# Altium PCB PCB_TechDemo.PcbDoc (part 2 of 2)
Units mm, origin at the board's own origin, x right, y up, seen from the top; angles counter-clockwise.
Board outline 152.4 x 101.6 mm, 2 copper layers (Top Layer, Bottom Layer); 203 components, 210 nets, 892 pads, 0 vias.
Unrouted connection lines stored in the file: 608.
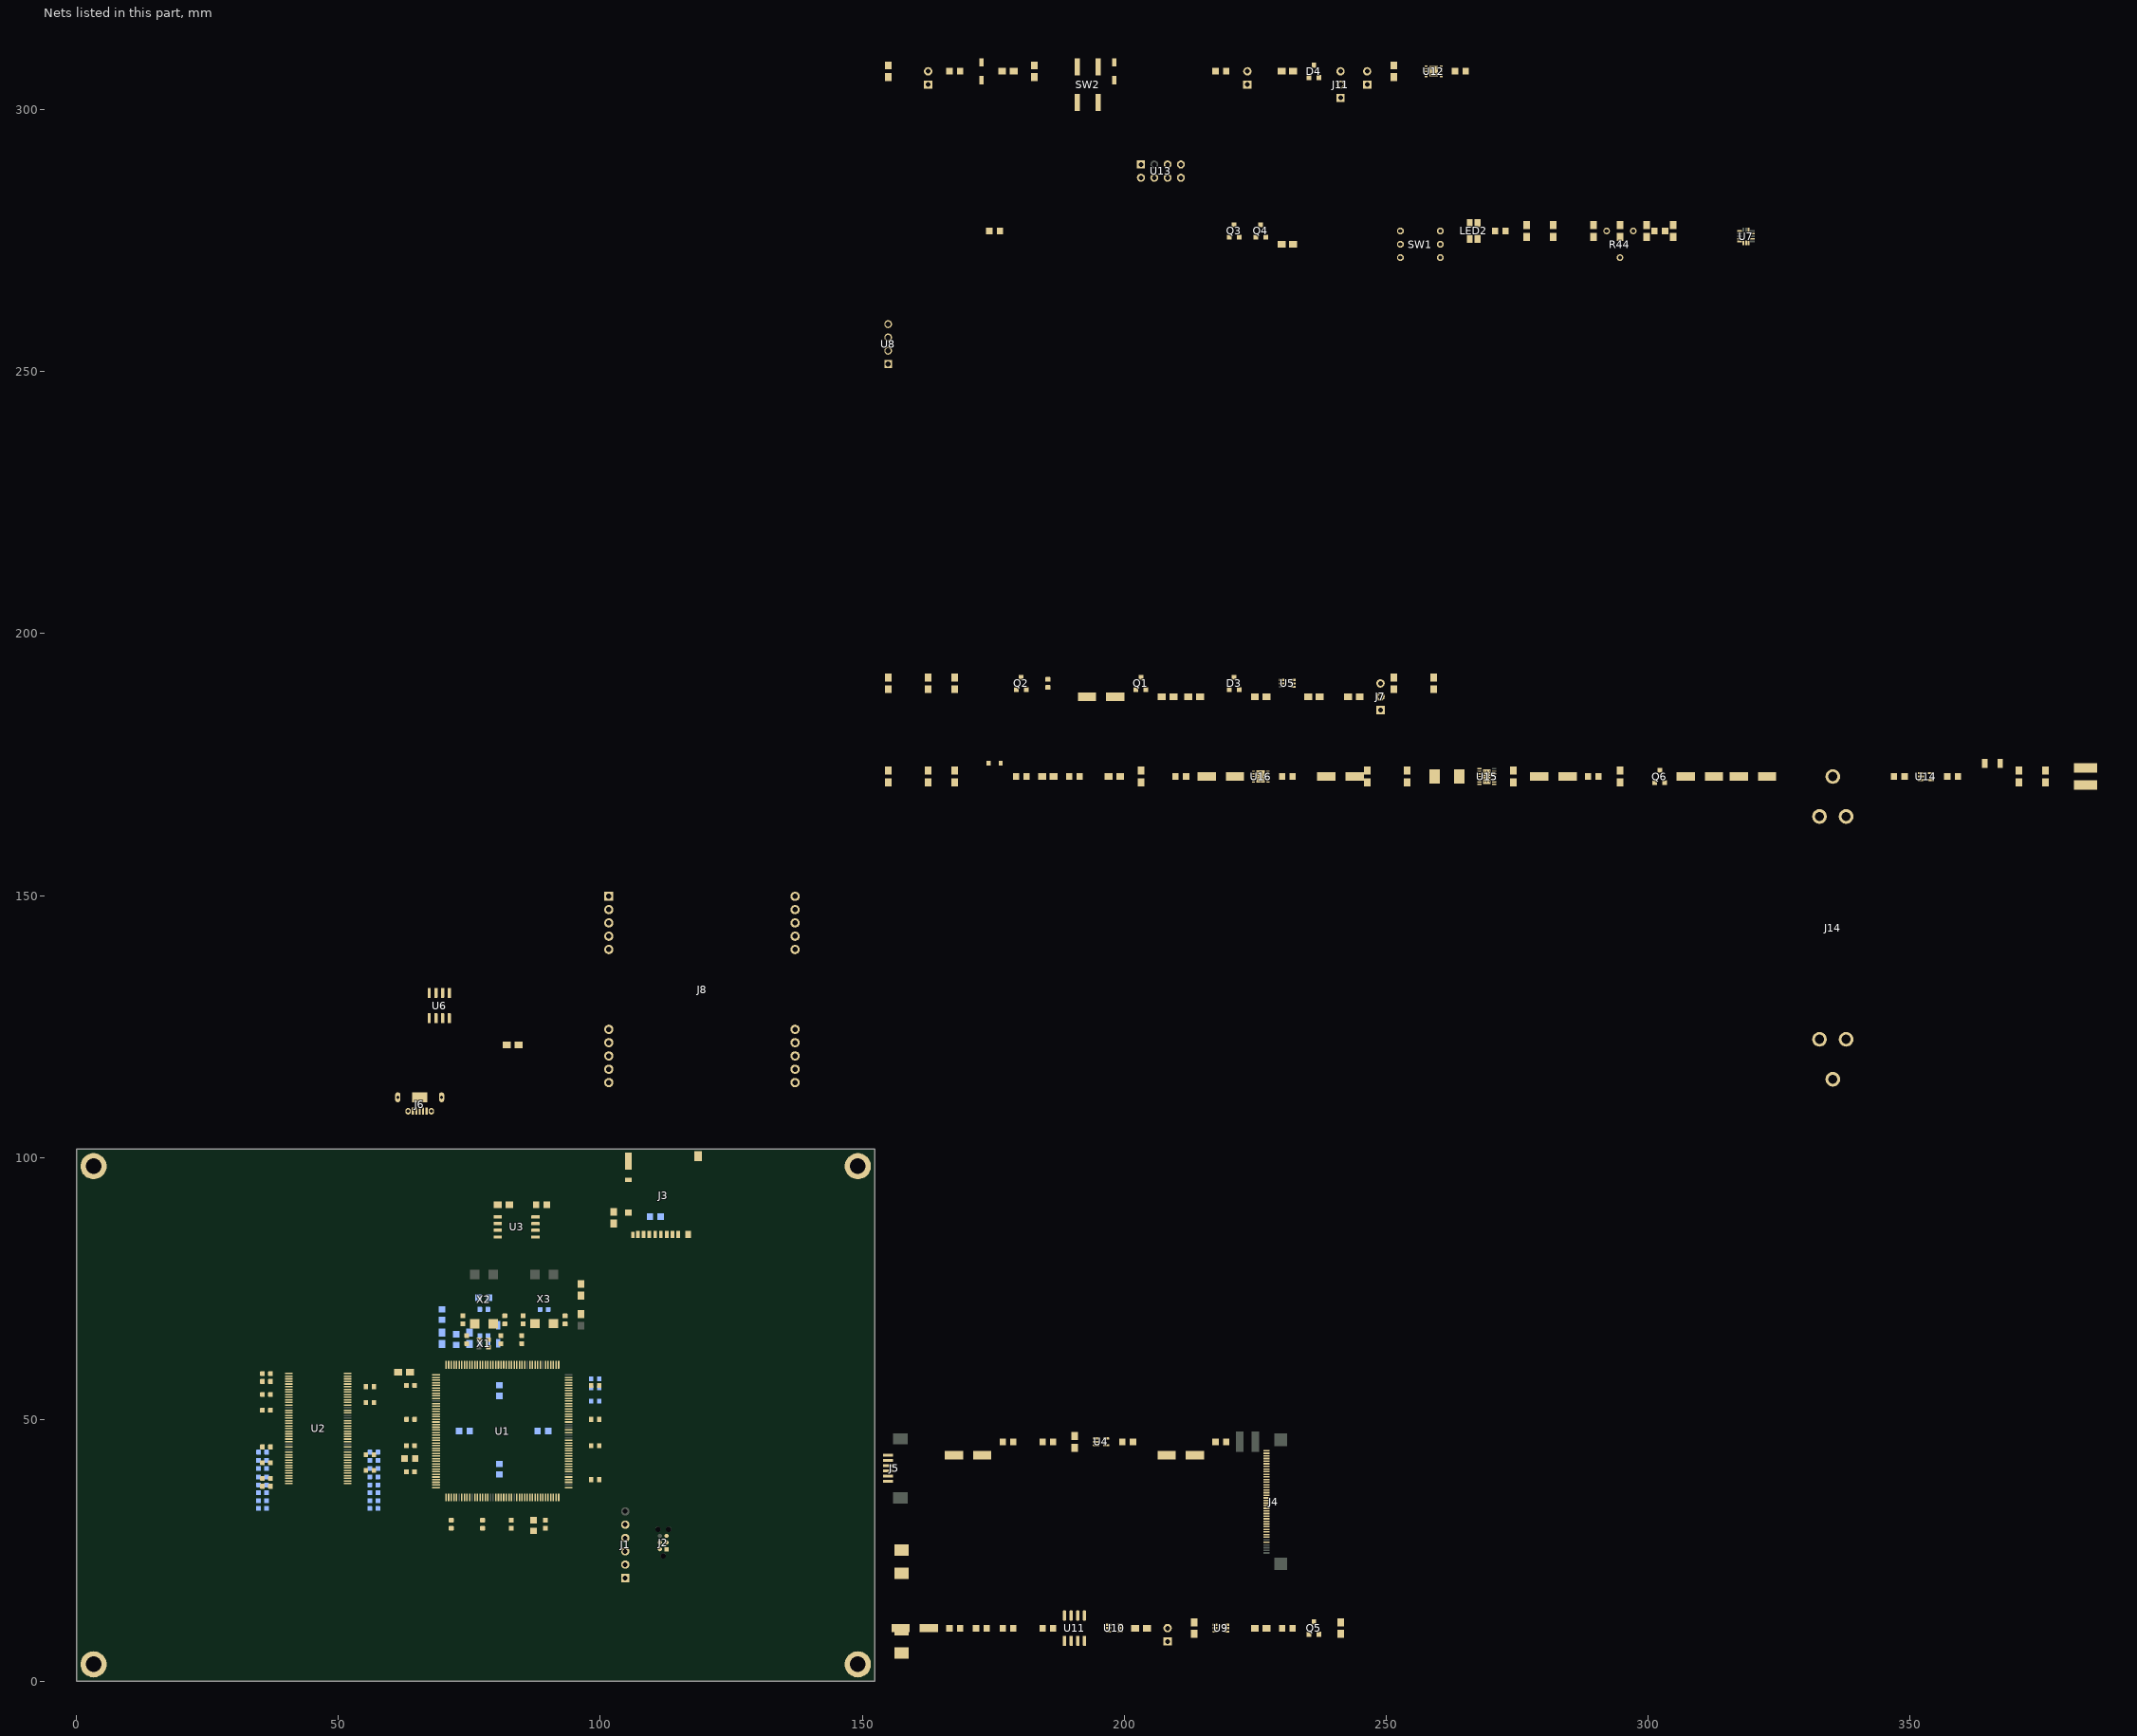
[diagram p2: the nets of this part, all layers, seen from the top]

## Part data
C1 C22 C23 C24 C25 C26 C27 C28 C29 C54 C61 C62 C63: library part CAP_2.2UF_50V_0805, "CAP CER 2.2UF 50V X7R 0805", Case/Package=0805, Supplier Part Number 1=587-4963-1-ND, TOLERANCE=20%, VOLTAGE=50V, MFG="Taiyo Yuden", MFG_PN=UMK212BB7225MG-T, Supplier 1=Digi-Key
C2 C3: library part CAP_27PF_50V_0603, "CAP CER 4.7PF 50V C0G/NPO 0603", Case/Package=0603, Supplier Part Number 1=311-4032-1-ND, TOLERANCE=10%, VOLTAGE=50V, MFG=Yageo, MFG_PN=CC0603KRNPO9BN270, Supplier 1=Digi-Key
C4 C5: library part CAP_4.7PF_50V_0603, "CAP CER 4.7PF 50V C0G/NPO 0603", Case/Package=0603, Supplier Part Number 1=311-1740-1-ND, TOLERANCE=+/-.25pF, VOLTAGE=50V, MFG=Yageo, MFG_PN=CC0603CRNPO9BN4R7, Supplier 1=Digi-Key
C6 C7 C8 C9 C10 C11 C12 C13 C14 C15 C16 C17 C18 C19 C20 C21 C32 C33 C34 C35 C36 C37 C38 C39 C40 C41 C42 C43: library part CAP_0.1UF_50V_0603, "CAP CER 0.1UF 50V X7R 0603", Case/Package=0603, Supplier Part Number 1=311-1344-1-ND, TOLERANCE=10%, VOLTAGE=50V, MFG=Yageo, MFG_PN=CC0603KRX7R9BB104, Supplier 1=Digi-Key
  C32 C33 C34 C35 C36 C37 C38 C39 C40 C41 C42 C43: ClassName=Memory_SDRAM
C30 C31 C44 C47 C48 C51 C52 C53 C56 C57 C58 C60 C64 C67 C70 C74: library part CAP_0.1UF_50V_0805, "CAP CER 0.1UF 50V X7R 0805", Case/Package=0805, Supplier Part Number 1=478-1395-1-ND, TOLERANCE=10%, VOLTAGE=50V, MFG=AVX, MFG_PN=08055C104KAT2A, Supplier 1=Digi-Key
  C30: ClassName=Memory_Quad_SPI_Flash
  C31: ClassName=Memory_MicroSD
  C51: ClassName=UI_Accelerometer
  C52: ClassName=UI_ADC
  C53: ClassName=UI_UltraSonic
  C64 C67: ClassName=Power_3V3
  C70: ClassName=Power_5V
  C74: ClassName=VBAT_Monitor
C45 C49 C50 C59 C65 C68 C69 C71: library part CAP_22UF_35V_ALE_NF, "CAP, AL E, 22UF, 35V, 20%, ROHS", Supplier Part Number 1=493-10138-1-ND, TOLERANCE=20%, VOLTAGE=35V, MFG=NICHICON, MFG_PN=UZS1C220MCL1GB, Supplier 1=Digi-Key
  C50: ClassName=Serial_USB_FS
  C65: ClassName=Power_3V3
  C69 C71: ClassName=Power_5V
C46 C55: library part CAP_1.0UF_50V_0805, "CAP CER 1UF 50V X7R 0805", Case/Package=0805, Supplier Part Number 1=587-6375-1-ND, TOLERANCE=20%, VOLTAGE=50V, MFG="Taiyo Yuden", MFG_PN=UMK212B7105MGHT, Supplier 1=Digi-Key
C66: library part CAP_47UF_16V_ALE_NF, "CAP ALUM 47UF 20% 16V SMD", Supplier Part Number 1=493-3916-1-ND, TOLERANCE=20%, VOLTAGE=16V, ClassName=Power_3V3, MFG=NICHICON, MFG_PN=UCL1C470MCL6GS, Supplier 1=Digi-Key
C72: library part CAP_18PF_50V_0805, "CAP CER 18PF 50V C0G/NP0 0805", Case/Package=0805, Supplier Part Number 1=738-CML0805C0G180JT50VCT-ND, TOLERANCE=5%, VOLTAGE=50V, ClassName=Power_5V, MFG="Stackpole Electronics Inc", MFG_PN=CML0805C0G180JT50V, Supplier 1=Digi-Key
C73: library part CAP_18NF_50V_0805, "CAP CER 0.018UF 50V X7R 0805", Case/Package=0805, Supplier Part Number 1=311-1137-1-ND, TOLERANCE=10%, VOLTAGE=50V, ClassName=Power_5V, MFG=Yageo, MFG_PN=CC0805KRX7R9BB183, Supplier 1=Digi-Key
D1 D5 D6: library part DIODE_1N4148W-7-F, "DIODE GEN PURP 100V 300MA SOD123", Case/Package=SOD-123, CURRENT=300mA, Supplier Part Number 1=1N4148W-FDICT-ND, MFG="Diodes Incorporated", MFG_PN=1N4148W-7-F, Supplier 1=Digi-Key
D2 D7: library part DIODE_SCHOTTKY_MBRS2040LT3G, "DIODE SCHOTTKY 40V 2A SMB", Case/Package=SMB, CURRENT=2A, Supplier Part Number 1=MBRS2040LT3GOSCT-ND, ComponentLink1Description="Manufacturer Link", ComponentLink1URL=http://www.fairchildsemi.com/, ComponentLink2Description=Datasheet, ComponentLink2URL=http://www.fairchildsemi.com/ds/1N%2F1N4148.pdf, MFG="ON SEMICONDUCTOR", MFG_PN=MBRS2040LT3G, PackageReference=DO-35, Supplier 1=Digi-Key
D3 D4: library part DIODE_TVS_GSOT03C-G3-08, "TVS DIODE 3.3V 12.3V SOT23", Case/Package=SOT-23, POWER="30A (8/20us)", Supplier Part Number 1=GSOT03C-G3-08GICT-ND, MFG="Vishay Semiconductor", MFG_PN=GSOT03C-G3-08, Supplier 1=Digi-Key
  D3: ClassName=Serial_DebugPort
D8: library part DIODE_ZENER_MMSZ5227BS-7-F, "DIODE ZENER 3.6V 200MW SOD323", Case/Package=SOD323, POWER=200mW, Supplier Part Number 1=MMSZ5227BS-FDICT-ND, ClassName=VBAT_Monitor, MFG="Vishay Semiconductor", MFG_PN=MMSZ5227BS-7-F, Supplier 1=Digi-Key
FB1 FB2 FB3 FB4 FB5: library part FERRITE_BLM21AG102SN1D, "FERRITE, 1KOHM AT 100MHZ, 220MA, .450DCR", Supplier Part Number 1=490-1041-1-ND, TOLERANCE=10%, MFG=MURATA, MFG_PN=BLM21AG102SN1D, Supplier 1=Digi-Key
  FB2: ClassName=Serial_USB_FS
  FB3: ClassName=Serial_DebugPort
  FB4: ClassName=UI_ADC
J1: library part CONN_6P_SINGLE_ROW, "CONN HEADER VERT 6POS 2.54MM", Case/Package=6P_2.54MM, Supplier Part Number 1=S1212EC-06-ND, MFG="Sullins Connector Solutions", MFG_PN=PREC006SFAN-RC, Supplier 1=Digi-Key
J2: "CABLE TAG-CONNECT IN-CIRCUIT", Supplier Part Number 1=TC2030-MCP-NLTC-ND, MFG="Tag-Connect LLC", MFG_PN=TC2030-MCP-NL, Supplier 1=Digi-Key
J3: library part CONN_HIROSE_DM3BT-DSF-PEJS, "CONN MICRO SD CARD PUSH-PUSH R/A", Supplier Part Number 1=HR1942CT-ND, ClassName=Memory_MicroSD, MFG="Hirose Electric Co Ltd", MFG_PN=DM3BT-DSF-PEJS, Supplier 1=Digi-Key
J4: library part CONN_MOLEX_0541044033, "CONN FFC TOP 40POS 0.50MM R/A", Supplier Part Number 1=WM11091CT-ND, Case/Package=0541044033, MFG=Molex, MFG_PN=0541044033, Supplier 1=Digi-Key
J5: library part CONN_MOLEX_0522710679, "CONN FPC BOTTOM 6POS 1.00MM R/A", Supplier Part Number 1=WM7955CT-ND, Case/Package=0522710679, MFG=Molex, MFG_PN=0522710679, Supplier 1=Digi-Key
J6: library part CONN_USB_MOLEX_0475900001, "CONN RCPT MICRO USB AB 5P SMD RA", Supplier Part Number 1=WM17144CT-ND, ClassName=Serial_USB_FS, MFG=Molex, MFG_PN=0475900001, Supplier 1=Digi-Key
J7 J11: library part CONN_3P_SINGLE_ROW, "CONN HEADER VERT 3POS 2.54MM", Case/Package=3P_2.54MM, Supplier Part Number 1=S1212EC-03-ND, MFG="Sullins Connector Solutions", MFG_PN=PREC003SFAN-RC, Supplier 1=Digi-Key
  J7: ClassName=Serial_DebugPort
J8: library part CONN_TD_EXPANSION_MODULE, "CONN HEADER VERT 6POS 2.54MM", Case/Package=EXP_SLOT, Supplier Part Number 1=S7013-ND, MFG="Sullins Connector Solutions", MFG_PN=PPTC151LFBN-RC, Supplier 1=Digi-Key
J9 J10 J12 J13: library part CONN_2P_SINGLE_ROW, "CONN HEADER VERT 2POS 2.54MM", Case/Package=2P_2.54MM, Supplier Part Number 1=S1212EC-02-ND, MFG="Sullins Connector Solutions", MFG_PN=PREC002SFAN-RC, Supplier 1=Digi-Key
J14: library part CONN_BATTERY_18650, "BATTERY CONTACT CLP 18650 PC PIN", Case/Package=2P_2.54MM, Supplier Part Number 1=36-54-ND, MFG="Keystone Electronics", MFG_PN=54, Supplier 1=Digi-Key
L1: library part INDUCTOR_LPS4018-472MRC, "SHIELDED POWER INDUCTORS, 4.7UH", CURRENT=1.9A, Supplier Part Number 1=2457-LPS4018-472MRC-ND, TOLERANCE=20%, MFG=COILCRAFT, MFG_PN=LPS4018-472MRC, Supplier 1=Digi-Key
L2: library part INDUCTOR_SDR0403-1R0ML, "FIXED IND 1UH 3.8A 33 MOHM SMD", CURRENT=5.5A, Supplier Part Number 1=SDR0403-1R0MLCT-ND, TOLERANCE=20%, ClassName=Power_3V3, MFG="Bourns Inc.", MFG_PN=SDR0403-1R0ML, Supplier 1=Digi-Key
L3: library part INDUCTOR_IHLP2020BZER1R0M01, "FIXED IND 1UH 3.8A 33 MOHM SMD", CURRENT=16A, Supplier Part Number 1=541-1087-1-ND, TOLERANCE=20%, ClassName=Power_5V, MFG="Bourns Inc.", MFG_PN=IHLP2020BZER1R0M01, Supplier 1=Digi-Key
LED1: library part DIODE_LED_GREEN_LTST-C170GKT, "DIODE, LED GREEN CLEAR SMD", Case/Package=0805, Supplier Part Number 1=160-1179-1-ND, MFG="Lite-On Inc.", MFG_PN=LTST-C170GKT, Supplier 1=Digi-Key
LED2: library part LED_RED_GREEN_HSMF-A201-A00J1, "LED GREEN/RED CLEAR 4PLCC SMD", Case/Package=4PLCC, Supplier Part Number 1=516-2491-1-ND, ClassName=UI_LED, MFG="Broadcom Limited", MFG_PN=HSMF-A201-A00J1, Supplier 1=Digi-Key
MTH1 MTH2 MTH3 MTH4: "3MM IN D. MT HOLE"
Q1: library part MOSFET_PCH_IRLML5103PBF, "MOSFET P CHN, VDS=30V, RDSON = .6OHM, SOT 23", Supplier Part Number 1=IRLML5103PBFCT-ND, ClassName=Serial_USB_FS, ComponentLink1Description="Manufacturer Link", ComponentLink1URL=http://www.fairchildsemi.com/, ComponentLink2Description=Datasheet, ComponentLink2URL=http://www.fairchildsemi.com/ds/2N%2F2N3904.pdf, MFG="INTERNATIONAL RECTIFIER", MFG_PN=IRLML5103PBF, Supplier 1=Digi-Key
Q2 Q3 Q4 Q5: library part MOSFET_NCH_2N7002-7-F, "MOSFET N-CH 60V 115MA SOT23-3", Case/Package=SOT-23, Supplier Part Number 1=2N7002-FDICT-ND, MFG="Diodes Incorporated", MFG_PN=2N7002-7-F, Supplier 1=Digi-Key
  Q2: ClassName=Serial_USB_FS
  Q3 Q4: ClassName=UI_LED
Q6: library part MOSFET_PCH_NTR3A30PZT1G, "MOSFET P-CH 20V 3A SOT23-3", Supplier Part Number 1=NTR3A30PZT1GOSCT-ND, ComponentLink1Description="Manufacturer Link", ComponentLink1URL=http://www.fairchildsemi.com/, ComponentLink2Description=Datasheet, ComponentLink2URL=http://www.fairchildsemi.com/ds/2N%2F2N3904.pdf, MFG="ON Semiconductor", MFG_PN=NTR3A30PZT1G, Supplier 1=Digi-Key
R1: library part RES_200_0805_1/8W_1%_1, "RES SMD 200 OHM 1% 1/8W 0805", Case/Package=0805, POWER=.125W, Supplier Part Number 1=311-200CRCT-ND, TOLERANCE=1%, MFG=Yageo, MFG_PN=RC0805FR-07200RL, Supplier 1=Digi-Key
R2 R3: library part RES_1M_0603_1/10W_1%, "RES SMD 1M OHM 1% 1/10W 0603", Case/Package=0603, POWER=.10W, Supplier Part Number 1=311-1.00MHRCT-ND, TOLERANCE=1%, MFG=Yageo, MFG_PN=RC0603FR-071ML, Supplier 1=Digi-Key
R4 R5 R34: library part RES_10K_0603_1/10W_1%, "RES SMD 10K OHM 1% 1/10W 0603", Case/Package=0603, POWER=.10W, Supplier Part Number 1=311-10.0KHRCT-ND, TOLERANCE=1%, MFG=Yageo, MFG_PN=RC0603FR-0710KL, Supplier 1=Digi-Key
  R34: ClassName=Serial_USB_FS
R6 R7 R11 R12 R13 R14 R15 R16 R17 R18 R19 R20 R21 R22 R23 R24 R25 R26: library part RES_100K_0603_1/10W_1%, "RES SMD 100K OHM 1% 1/10W 0603", Case/Package=0603, POWER=.10W, Supplier Part Number 1=311-10.0KHRCT-ND, TOLERANCE=1%, MFG=Yageo, MFG_PN=RC0603FR-07100KL, Supplier 1=Digi-Key
  R11 R12 R13 R14 R15 R16 R17 R18 R19 R20 R21 R22 R23 R24 R25 R26: ClassName=Memory_SDRAM
R8 R29 R30 R55 R56 R59 R60: library part RES_0_0805_1/8W, "RES SMD 0 OHM JUMPER 1/8W 0805", Case/Package=0805, POWER=.125W, Supplier Part Number 1=311-0.0ARCT-ND, TOLERANCE=JUMPER, MFG=Yageo, MFG_PN=RC0805JR-070RL, Supplier 1=Digi-Key
  R29 R30: ClassName=Serial_USB_FS
  R55 R56: ClassName=Power_3V3
  R59 R60: ClassName=Power_5V
R9: library part RES_10K_0805_1/4W_1%_1, "RES SMD 10K OHM 1% 1/4W 0805", Case/Package=0805, POWER=.125W, Supplier Part Number 1=311-0.0ARCT-ND, TOLERANCE=JUMPER, MFG=Yageo, MFG_PN=RC0805JR-070RL, Supplier 1=Digi-Key
R10 R45 R47 R49 R52: library part RES_10K_0805_1/4W_1%, "RES SMD 10K OHM 1% 1/4W 0805", Case/Package=0805, POWER=.25W, Supplier Part Number 1=2019-SG73S2ATTD1002FCT-ND, TOLERANCE=1%, MFG="KOA Speer Electronics, Inc.", MFG_PN=SG73S2ATTD1002F, Supplier 1=Digi-Key
  R10: ClassName=Memory_Quad_SPI_Flash
  R45: ClassName=UI_Accelerometer
R27 R35 R36 R37 R40 R41 R42 R43 R46 R48 R50 R51 R53 R61 R64 R65 R66: library part RES_100K_0805_1/4W_1%, "RES SMD 100K OHM 1% 1/4W 0805", Case/Package=0805, POWER=.25W, Supplier Part Number 1=2019-RK73H2ATTD1003FCT-ND, TOLERANCE=1%, MFG="KOA Speer Electronics, Inc.", MFG_PN=RK73H2ATTD1003F, Supplier 1=Digi-Key
  R27: ClassName=Memory_MicroSD
  R35 R36 R37: ClassName=Serial_USB_FS
  R40 R41 R42 R43: ClassName=UI_HexSwitch
  R61 R65 R66: ClassName=Power_5V
  R64: ClassName=VBAT_Monitor
R28: library part RES_5.1_0805_1/4W_1%, "RES 5.1 OHM 1% 1/4W 0805", Case/Package=0805, POWER=.25W, Supplier Part Number 1=2019-RK73H2ATTD5R10FCT-ND, TOLERANCE=1%, MFG="KOA Speer Electronics, Inc.", MFG_PN=RK73H2ATTD5R10F, Supplier 1=Digi-Key
R31 R32: library part RES_15K_0805_1/8W_1%, "RES SMD 15K OHM 1% 1/8W 0805", Case/Package=0805, POWER=.125W, Supplier Part Number 1=311-15.0KCRCT-ND, TOLERANCE=1%, ClassName=Serial_USB_FS, MFG=Yageo, MFG_PN=RC0805FR-0715KL, Supplier 1=Digi-Key
R33: library part RES_1K_0805_1/8W_1%, "RES SMD 1K OHM 1% 1/8W 0805", Case/Package=0805, POWER=.125W, Supplier Part Number 1=311-1.00KCRCT-ND, TOLERANCE=1%, ClassName=Serial_USB_FS, MFG=Yageo, MFG_PN=RC0805FR-071KL, Supplier 1=Digi-Key
R38 R39: library part RES_120_0805_1/4W_1%, "RES 120 OHM 1% 1/4W 0805", Case/Package=0805, POWER=0.25W, Supplier Part Number 1=2019-RK73H2ATTD1200FCT-ND, TOLERANCE=1%, ClassName=UI_LED, MFG="KOA Speer Electronics, Inc.", MFG_PN=RK73H2ATTD1200F, Supplier 1=Digi-Key
R44: library part RES_POT_10K_500mW, "TRIMMER 10K OHM 0.5W PC PIN TOP", Case/Package="PIN TOP", POWER=.5W, Supplier Part Number 1=3386F-103TLF-ND, ClassName=UI_ADC, MFG="Bourns Inc.", MFG_PN=3386F-1-103TLF, Supplier 1=Digi-Key
R54: library part RES_0.140_1206_1/4W_1%, "RES 0.14 OHM 1% 1/4W 1206", Case/Package=1206, POWER=.25, Supplier Part Number 1=311-.14LWCT-ND, TOLERANCE=1%, MFG=Yageo, MFG_PN=RL1206FR-070R14L, Supplier 1=Digi-Key
R57: library part RES_768K_0805_1/8W_1%, "RES SMD 768K OHM 1% 1/8W 0805", Case/Package=0805, POWER=.125W, Supplier Part Number 1=311-768KCRCT-ND, TOLERANCE=1%, ClassName=Power_3V3, MFG=Yageo, MFG_PN=RC0805FR-07768KL, Supplier 1=Digi-Key
R58: library part RES_137K_0805_1/8W_1%, "RES SMD 137K OHM 1% 1/8W 0805", Case/Package=0805, POWER=.125W, Supplier Part Number 1=311-137KCRCT-ND, TOLERANCE=1%, ClassName=Power_3V3, MFG=Yageo, MFG_PN=RC0805FR-07137KL, Supplier 1=Digi-Key
R62: library part RES_40.2K_0805_1/8W_1%_1, "RES SMD 40.2K OHM 1% 1/8W 0805", Case/Package=0805, POWER=.125W, Supplier Part Number 1=311-40.2KCRCT-ND, TOLERANCE=1%, ClassName=VBAT_Monitor, MFG=Yageo, MFG_PN=RC0805FR-0740K2L, Supplier 1=Digi-Key
R63: library part RES_402K_0805_1/8W_1%, "RES SMD 402K OHM 1% 1/8W 0805", Case/Package=0805, POWER=.125W, Supplier Part Number 1=311-402KCRCT-ND, TOLERANCE=1%, ClassName=Power_5V, MFG=Yageo, MFG_PN=RC0805FR-07402KL, Supplier 1=Digi-Key
SW1: library part SW_DIP_220ADC16, "SWITCH ROTARY DIP HEX 100MA 50V", Supplier Part Number 1=CT3070-ND, Case/Package=220ADC16, ClassName=UI_HexSwitch, MFG="CTS Electrocomponents", MFG_PN=220ADC16, Supplier 1=DigiKey
SW2: library part SWITCH_EVQ-Q2U02W, "SWITCH TACTILE SPST-NO 0.02A 15V", Case/Package=EVQ-Q2, Supplier Part Number 1=P12954SCT-ND, MFG="Panasonic Electronic Components", MFG_PN=EVQ-Q2U02W, Supplier 1=Digi-Key
U1: library part IC_STM32F746NGH6U, "STM32F746NGH6 (STM32F7 Birdie) TBGA216", Case/Package=176LQFP, Supplier Part Number 1=497-15817-ND, MFG=STMicroelectronics, MFG_PN=STM32F746IGT6, Supplier 1=DigiKey
U2: library part "IC_ IS42S32400F-6TL", "IC DRAM 128M PARALLEL 86TSOP II", Case/Package=86TSSOPII, Supplier Part Number 1=870-IS42S32400F-6TL, ClassName=Memory_SDRAM, MFG="ISSI, Integrated Silicon Solution Inc", MFG_PN=IS42S32400F-6TL-TR, Supplier 1=Mouser
U3: library part IC_MT25QL128ABA1ESE-0SIT, "IC FLASH 128M SPI 133MHZ 8SOP2", Case/Package=8SOP2, Supplier Part Number 1=557-1772-1-ND, ClassName=Memory_Quad_SPI_Flash, MFG="Micron Technology Inc.", MFG_PN=MT25QL128ABA1ESE-0SIT, Supplier 1=Digi-Key
U4: library part IC_TPS61169DCKR, "IC LED DRVR RGLTR DIM 1.8A SC70", Case/Package=SC70, Supplier Part Number 1=296-40821-1-ND, MFG="Texas Instruments", MFG_PN=TPS61169DCKR, Supplier 1=Digi-Key
U5: library part IC_RCLAMP0504FATCT, "TVS DIODE 5V 25V SC70-6", Supplier Part Number 1=RCLAMP0504FATCTCT-ND, ClassName=Serial_USB_FS, MFG="Semtech Corporation", MFG_PN=RCLAMP0504FATCT, Supplier 1=Digi-Key
U6: library part IC_STMPS2141MTR, "IC PWR SWITCH N-CHANNEL 1:1 8SO", Case/Package=SO8, Supplier Part Number 1=497-6932-1-ND, ClassName=Serial_USB_FS, MFG=STMicroelectronics, MFG_PN=STMPS2141MTR, Supplier 1=Digi-Key
U7: library part IC_LIS3DHTR, "ACCEL 2-16G I2C/SPI 16LGA", Supplier Part Number 1=497-10613-1-ND, ClassName=UI_Accelerometer, MFG=STMicroelectronics, MFG_PN=LIS3DHTR, Supplier 1=Digi-Key
U8: library part MODULE_RCWL-1601, "MODULE ULTRASONIC SENSOR 3V", Supplier Part Number 1=1528-2832-ND, Case/Package=4007, ClassName=UI_UltraSonic, MFG="Adafruit Industries LLC", MFG_PN=4007, Supplier 1=Digi-Key
U9: library part IC_TPL0401A-10DCKR, "IC DGTL POT 10KOHM 128TAP SC70-6", Case/Package=SC70-6, POWER=5.5V, Supplier Part Number 1=296-29676-1-ND, TOLERANCE=20%, MFG="Texas Instruments", MFG_PN=TPL0401A-10DCKR, Supplier 1=Digi-Key
U10: library part IC_OPAMP_TSV620ILT, "IC OPAMP GP 1 CIRCUIT SOT23-6", Case/Package=SOT23-6, Supplier Part Number 1=497-10160-1-ND, MFG=STMicroelectronics, MFG_PN=TSV620ILT, Supplier 1=Digi-Key
U11: library part IC_OPAMP_LM4861, "IC AMP CLASS AB MONO 1.5W 8SOIC", Case/Package=8SOIC, Supplier Part Number 1=296-38566-1-ND, MFG="Texas Instruments", MFG_PN=LM4861MX/NOPB, Supplier 1=Digi-Key
U12: library part IC_NX3DV221TKX, "IC USB 2.0 SWITCH HS 10HVSON", Case/Package=10-DFN, Supplier Part Number 1=568-10368-1-ND, MFG="NXP USA Inc.", MFG_PN=NX3DV221TKX, Supplier 1=Digi-Key
U13: library part MODULE_WRL-1746, "WIFI MODULE - ESP8266 4MB FLASH", Case/Package=WRL-1746, MFG=Sparkfun, MFG_PN=WRL-17146, Supplier 1=Digi-Key
U14: library part IC_MCP73826-4.1VCHTR, "IC CONTROLLR LI-ION 4.1V SOT23-6", Supplier Part Number 1=MCP73826-4.1VCHCT-ND, MFG="Microchip Technology", MFG_PN=MCP73826-4.1VCHTR, Supplier 1=Digi-Key
U15: library part IC_TPS63020DSJR, "IC REG BCK BST ADJ 3.5A 14VSON", Case/Package=14VSON, Supplier Part Number 1=296-36491-1-ND, ClassName=Power_3V3, MFG="Texas Instruments", MFG_PN=TPS63020DSJR, Supplier 1=Digi-Key
U16: library part IC_TPS61230DRCR, "IC REG BOOST ADJ 4A 10VSON", Case/Package=10VSON, Supplier Part Number 1=296-37761-1-ND, ClassName=Power_5V, MFG="Texas Instruments", MFG_PN=TPS61230DRCR, Supplier 1=Digi-Key
X1: library part IC_OSC_ECS-2520MVLC-250-BN-TR, "XTAL OSC XO 25MHZ CMOS SMD", Case/Package=4-SMD, Supplier Part Number 1=50-ECS-2520MVLC-250-BN-CT-ND, MFG="ECS Inc.", MFG_PN=ECS-2520MVLC-250-BN-TR, Supplier 1=Digi-Key
X2: library part XTAL_25HZ_6PF_SMD, "CRYSTAL 25.0000MHZ 18PF SMD", Case/Package=XTAL_ECS, Supplier Part Number 1=XC2030-1-ND, TOLERANCE=30PPM, MFG="ECS Inc.", MFG_PN=ECS-250-18-7SX-TR, Supplier 1=Digi-Key
X3: library part XTAL_32.768KHZ_6PF_SMD, "CRYSTAL 32.7680KHZ 6PF SMD", Case/Package=XTAL_ECS, Supplier Part Number 1=SER4097CT-ND, TOLERANCE=100ppm, MFG=EPSON, MFG_PN="MC-306 32.7680K-E0:PURE SN", Supplier 1=Digi-Key

## Nets (pads, with @x,y where several pads share a name; then routed paths per layer and width w, separated by ;. In a path a pad name is that pad's centre, name@x,y a point inside that pad or via, vN(x,y) a via of type N, cw(c..) or ccw(c..) an arc to the next point about the centre after c; other vN are vias at no path point)
3V3: C1.1 C7.1 C8.1 C9.1 C10.1 C11.1 C12.1 C13.1 C14.1 C15.1 C16.1 C17.1 C18.1 C19.1 C20.1 C21.1 C22.1 C23.1 C24.1 C25.1 C26.1 C30.1 C31.1 C32.1 C33.1 C34.1 C35.1 C36.1 C37.1 C38.1 C39.1 C40.1 C41.1 C42.1 C43.1 C44.1 C45.1 C47.1 C48.1 C49.1 C51.1 C53.1 C56.1 C57.1 C58.1 C59.1 C60.1 C61.1 D1.2 D5.2 FB1.1 FB4.2 J1.1 J2.1 J3.4 J3.SW-A J4.4 J5.1 J8.20 J10.1 J12.2 Q2.1 R4.1 R7.1 R10.2 R35.2 R36.2 R37.2 R38.2 R39.2 R40.2 R41.2 R42.2 R43.2 R45.2 R46.2 R51.2 R56.2 R66.2 U1.6 U1.15 U1.23 U1.36 U1.49 U1.62 U1.72 U1.82 U1.91 U1.103 U1.114 U1.127 U1.136 U1.149 U1.159 U1.172 U2.1 U2.3 U2.9 U2.15 U2.29 U2.35 U2.41 U2.43 U2.49 U2.55 U2.75 U2.81 U3.8 U4.5 U7.1 U7.14 U8.1 U9.1 U10.6 U11.6 U12.10 U13.8 X1.1
5V: J8.18 R60.2 U6.2 U6.3
5V_EN: R61.2 U16.9
5V_GOOD: R66.1 U16.5
ACEL_NEN: R45.1 U1.95 U7.8
ADC1_IN5: C52.1 R44.2 U1.51
ADC1_IN6: C74.1 D8.2 R62.1 R64.2 U1.52
AUDIO_EN: Q5.1 R48.2 U1.92 U10.5
BOOT0: R6.2 U1.166
DAC_OUT1: C54.1 U1.50
DISPLAY_EN: J4.31 U1.132
FMC_A0: U1.16 U2.25
FMC_A1: U1.17 U2.26
FMC_A2: U1.18 U2.27
FMC_A3: U1.19 U2.60
FMC_A4: U1.20 U2.61
FMC_A5: U1.21 U2.62
FMC_A6: U1.60 U2.63
FMC_A7: U1.63 U2.64
FMC_A8: U1.64 U2.65
FMC_A9: U1.65 U2.66
FMC_A10: U1.66 U2.24
FMC_A11: U1.67 U2.21
FMC_BA0: U1.108 U2.22
FMC_BA1: U1.109 U2.23
FMC_D0: U1.104 U2.2
FMC_D1: U1.105 U2.4
FMC_D2: U1.142 U2.5
FMC_D3: U1.143 U2.7
FMC_D4: U1.68 U2.8
FMC_D5: U1.69 U2.10
FMC_D6: U1.70 U2.11
FMC_D7: U1.73 U2.13
FMC_D8: U1.74 U2.74
FMC_D9: U1.75 U2.76
FMC_D10: U1.76 U2.77
FMC_D11: U1.77 U2.79
FMC_D12: U1.78 U2.80
FMC_D13: U1.96 U2.82
FMC_D14: U1.97 U2.83
FMC_D15: U1.98 U2.85
FMC_NBL0: U1.169 U2.16
FMC_NBL1: U1.170 U2.71
FMC_SDCKE0: U1.35 U2.67
FMC_SDCLK: U1.112 U2.68
FMC_SDNCAS: U1.160 U2.18
FMC_SDNE0: U1.54 U2.20
FMC_SDNRAS: U1.59 U2.19
FMC_SDNWE: U1.32 U2.17
GND: C1.2 C2.2 C3.2 C4.2 C5.2 C6.2 C7.2 C8.2 C9.2 C10.2 C11.2 C12.2 C13.2 C14.2 C15.2 C16.2 C17.2 C18.2 C19.2 C20.2 C21.2 C22.2 C23.2 C24.2 C25.2 C26.2 C27.2 C28.2 C29.2 C30.2 C31.2 C32.2 C33.2 C34.2 C35.2 C36.2 C37.2 C38.2 C39.2 C40.2 C41.2 C42.2 C43.2 C44.2 C45.2 C46.2 C47.2 C48.2 C49.2 C50.2 C51.2 C52.2 C53.2 C55.2 C56.2 C57.2 C58.2 C59.2 C60.2 C61.2 C62.2 C63.2 C64.2 C65.2 C66.2 C67.2 C68.2 C69.2 C70.2 C71.2 C73.2 C74.2 D8.1 FB2.1 FB3.1 FB5.1 J1.3 J2.3 J3.6 J3.S1 J3.S2 J3.S3 J3.S4 J4.3 J4.29 J4.36 J5.2 J6.5 J8.3 J8.8 J8.13 J8.19 J13.2 J14.2 MTH1.1 MTH2.1 MTH3.1 MTH4.1 Q2.2 Q3.2 Q4.2 Q5.2 R1.1 R5.1 R6.1 R9.1 R11.1 R12.1 R13.1 R14.1 R15.1 R16.1 R17.1 R18.1 R19.1 R20.1 R21.1 R22.1 R23.1 R24.1 R25.1 R26.1 R27.1 R28.1 R31.1 R32.1 R37.1 R44.1 R48.1 R50.2 R53.1 R58.1 R61.1 R64.1 R65.1 SW1.C1 SW1.C2 SW2.1 SW2.3 U1.14 U1.22 U1.37 U1.61 U1.71 U1.90 U1.102 U1.113 U1.126 U1.135 U1.148 U1.158 U2.6 U2.12 U2.32 U2.38 U2.44 U2.46 U2.52 U2.58 U2.72 U2.78 U2.84 U2.86 U3.4 U4.2 U5.2 U6.1 U7.5 U7.10 U7.12 U8.4 U9.2 U10.2 U11.7 U12.5 U12.6 U12.11 U13.1 U14.2 U15.2 U15.15 U16.11 X1.2
HEX_1: R43.1 SW1.1 U1.145
HEX_2: R42.1 SW1.2 U1.146
HEX_4: R41.1 SW1.4 U1.147
HEX_8: R40.1 SW1.8 U1.151
I2C1_SCL: U1.167 U9.3
I2C1_SDA: U1.165 U9.4
I2C2_SCL: J8.4 U1.45
I2C2_SDA: J8.5 U1.46
I2C3_SCL: J5.3 U1.84
I2C3_SDA: J5.4 U1.85
LTDC_B0: J4.21 U1.3
LTDC_B1: J4.22 U1.155
LTDC_B2: J4.23 U1.150
LTDC_B3: J4.24 U1.154
LTDC_B4: J4.25 U1.173
LTDC_B5: J4.26 U1.174
LTDC_B6: J4.27 U1.175
LTDC_B7: J4.28 U1.168
LTDC_CLK: J4.30 U1.111
LTDC_DE: J4.34 U1.28
LTDC_G0: J4.13 U1.4
LTDC_G1: J4.14 U1.5
LTDC_G2: J4.15 U1.128
LTDC_G3: J4.16 U1.129
LTDC_G4: J4.17 U1.130
LTDC_G5: J4.18 U1.131
LTDC_G6: J4.19 U1.116
LTDC_G7: J4.20 U1.133
LTDC_HSYNC: J4.32 U1.12
LTDC_R0: J4.5 U1.43
LTDC_R1: J4.6 U1.44
LTDC_R2: J4.7 U1.41
LTDC_R3: J4.8 U1.56
LTDC_R4: J4.9 U1.87
LTDC_R5: J4.10 U1.88
LTDC_R6: J4.11 U1.57
LTDC_R7: J4.12 U1.110
LTDC_VSYNC: J4.33 U1.11
MOD_IO0: J8.17
MOD_IO1: J8.16
MOD_IO2: J8.15
MOD_IO3: J8.14
MOD_IO4: J8.12
MOD_IO5: J8.11
NA_0: R11.2 U2.31
NA_1: R12.2 U2.33
NA_2: R13.2 U2.34
NA_3: R14.2 U2.36
NA_4: R15.2 U2.37
NA_5: R16.2 U2.39
NA_6: R17.2 U2.40
NA_7: R18.2 U2.42
NA_8: R19.2 U2.45
NA_9: R20.2 U2.47
NA_10: R21.2 U2.48
NA_11: R22.2 U2.50
NA_12: R23.2 U2.51
NA_13: R24.2 U2.53
NA_14: R25.2 U2.54
NA_15: R26.2 U2.56
NAE: Q5.3 R46.1 U11.1
NetC2_1: C2.1 R2.1 U1.29 X1.4 X2.1
NetC3_1: C3.1 R2.2 U1.30 X2.4
NetC4_1: C4.1 R3.1 U1.9 X3.1
NetC5_1: C5.1 R3.2 U1.10 X3.4
NetC27_1: C27.1 FB1.2 R8.1 U1.39
NetC28_1: C28.1 U1.125
NetC29_1: C29.1 U1.81
NetC46_1: C46.1 D2.2 J4.2
NetC50_1: C50.1 Q1.3 R33.1 U6.6 U6.7 U6.8
NetC54_2: C54.2 U9.6
NetC55_1: C55.1 U11.2 U11.3
NetC62_1: C62.1 D5.1 R51.1 SW2.2 SW2.4 U13.6
NetC63_1: C63.1 D7.2 R54.1 U14.5
NetC64_1: C64.1 C66.1 R56.1 R57.2 U15.4 U15.5
NetC65_1: C65.1 R55.2 U15.10 U15.11
NetC67_1: C67.1 U15.1 U15.12 U15.13
NetC69_1: C69.1 L3.1 R59.2 U16.10
NetC70_1: C70.1 C71.1 C72.1 R60.1 R63.2 U16.3 U16.4
NetC72_2: C72.2 R63.1 R65.2 U16.7
NetC73_1: C73.1 U16.6
NetD2_1: D2.1 U4.1
NetD3_3: D3.3 FB3.2 J7.3
NetD4_1: D4.1 J11.1 U12.3
NetD4_2: D4.2 J11.2 U12.4
NetD4_3: D4.3 FB5.2 J11.3
NetD6_2: D6.2 R52.1 R53.2 U13.4
NetFB2_2: FB2.2 J6.S1 J6.S2 J6.S3 J6.S4 J6.S5
NetFB4_1: FB4.1 R44.3
NetJ4_1: J4.1 R28.2 U4.3
NetJ9_1: J9.1 R47.2 U11.5
NetJ9_2: J9.2 U11.8
NetJ10_2: J10.2 R50.1 U12.9
NetJ12_1: J12.1 R52.2
NetJ13_1: J13.1 U13.5
NetL2_1: L2.1 U15.8 U15.9
NetL2_2: L2.2 U15.6 U15.7
NetL3_2: L3.2 U16.1 U16.2
NetLED1_2: LED1.2 R1.2
NetLED2_1: LED2.1 Q3.3
NetLED2_2: LED2.2 R38.1
NetLED2_3: LED2.3 Q4.3
NetLED2_4: LED2.4 R39.1
NetQ1_1: Q1.1 Q2.3 R34.1
NetQ6_1: Q6.1 U14.4
NetQ6_2: Q6.2 R54.2
NetR8_2: R8.2 U1.38
NetR9_2: R9.2 U1.48
NetR47_1: R47.1 R49.2 U11.4
NetR49_1: R49.1 U10.3 U10.4
NetR57_1: R57.1 R58.2 U15.3
NetU9_5: U9.5 U10.1
NetU12_7: U12.7 U13.2
NetU12_8: U12.8 U13.7
NRST: C6.1 D1.1 J1.5 J2.5 R7.2 U1.31
OTG_FS_ID: J6.4 U1.121 U5.1
OTG_FS_N: R29.2 U1.122 U5.4
OTG_FS_P: R30.2 U1.123 U5.6
OTG_FS_VUSB: R33.2 U1.120
OTG_FS_VUSB_NEN: R35.1 U1.119 U6.4 U14.1
OTG_FS_VUSB_NER: R36.1 U1.53 U6.5
PDR_ON: R4.2 R5.2 U1.171
PWM_DISPLAY: U1.89 U4.4
PWM_GLED: Q4.1 U1.101
PWM_RLED: Q3.1 U1.100
QUADSPI_BK1_IO0: U1.26 U3.5
QUADSPI_BK1_IO1: U1.27 U3.2
QUADSPI_BK1_IO2: U1.25 U3.3
QUADSPI_BK1_IO3: U1.24 U3.7
QUADSPI_CLK: U1.58 U3.6
QUADSPI_NCS: R10.1 U1.164 U3.1
SDMMC1_CLK: J3.5 U1.141
SDMMC1_CMD: J3.3 U1.144
SDMMC1_D0: J3.7 U1.117
SDMMC1_D1: J3.8 U1.118
SDMMC1_D2: J3.1 U1.139
SDMMC1_D3: J3.2 U1.140
SPI1_MISO: U1.162 U7.7
SPI1_MOSI: U1.163 U7.6
SPI1_SCK: U1.161 U7.4
SPI2_MISO: J8.7 U1.34
SPI2_MOSI: J8.6 U1.33
SPI2_SCK: J8.9 U1.93
STM_SWCLK: J1.2 J2.2 U1.137
STM_SWDIO: J1.4 J2.4 U1.124
TOUCH_IRQ: J5.5 U1.83
TOUCH_NRST: J5.6 U1.86
UART2_TX: J8.1 J8.2
US_ECHO: U1.2 U8.3
US_TRIG: U1.1 U8.2
USART2_RX: U1.47 U12.1
USART2_TX: U1.42 U12.2
USART3_RX: D3.1 J7.2 U1.80
USART3_TX: D3.2 J7.1 U1.79
USB_N: J6.2 R29.1 R32.2
USB_P: J6.3 R30.1 R31.2
USD_DET: J3.SW-B R27.2 U1.8
VBAT: C68.1 J8.10 J14.1 Q6.3 R55.1 R59.1 R62.2 U14.3
VUSB: D7.1 J6.1 Q1.2 R34.2 U5.5
WIFI_EN: D6.1 U1.40
pads on no net: J1.6 J2.6 J2.7 J2.8 J2.9 J4.35 J4.37 J4.38 J4.39 J4.40 J4.41 J4.42 J5.7 J5.8 L1.5 L1.6 LED1.1 U1.7 U1.13 U1.55 U1.94 U1.99 U1.106 U1.107 U1.115 U1.134 U1.138 U1.152 U1.153 U1.156 U1.157 U1.176 U2.14 U2.28 U2.30 U2.57 U2.59 U2.69 U2.70 U2.73 U5.3 U7.2 U7.3 U7.9 U7.11 U7.13 U7.15 U7.16 U13.3 U15.14 U15.16 U15.17 U15.18 U15.19 U15.20 U15.21 U15.22 U15.23 U15.24 U15.25 U15.26 U15.27 U15.28 U15.29 U15.30 U16.8 U16.12 U16.13 U16.14 U16.15 X1.3 X2.2 X2.3 X3.2 X3.3

## Text inside footprints (layer, text, board x,y; h text height)
J8: Top Overlay "01" at 103.505,149.225 h1.27; Top Overlay "20" at 133.35,149.225 h1.27; Top Overlay "16" at 133.35,113.665 h1.27; Top Overlay "15" at 103.505,113.665 h1.27